# Altium PCB button pad.PcbDoc
Units mm, origin at the board's own origin, x right, y up, seen from the top; angles counter-clockwise.
Board outline 193 x 66 mm, 2 copper layers (Top Layer, Bottom Layer); 19 components, 63 nets, 125 pads, 1 vias.
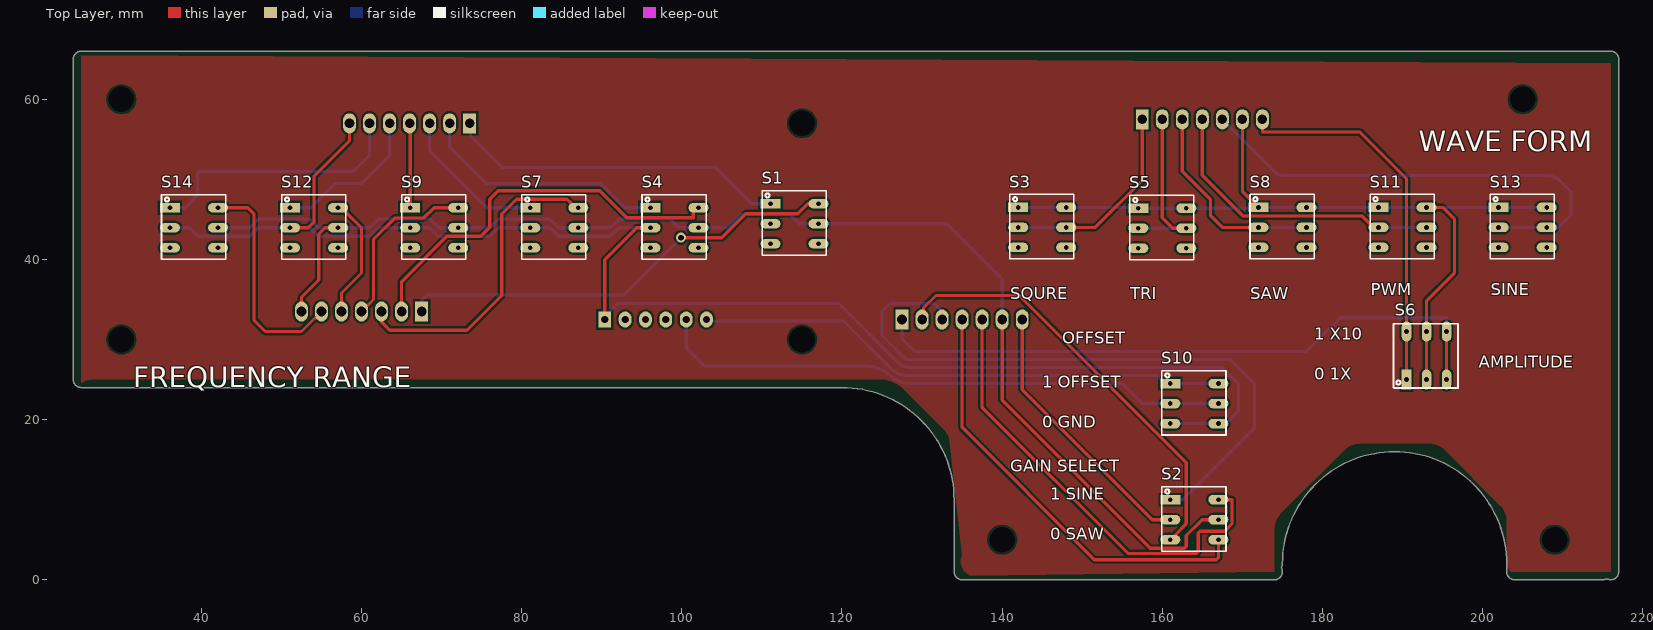
[diagram p0: Top Layer view]
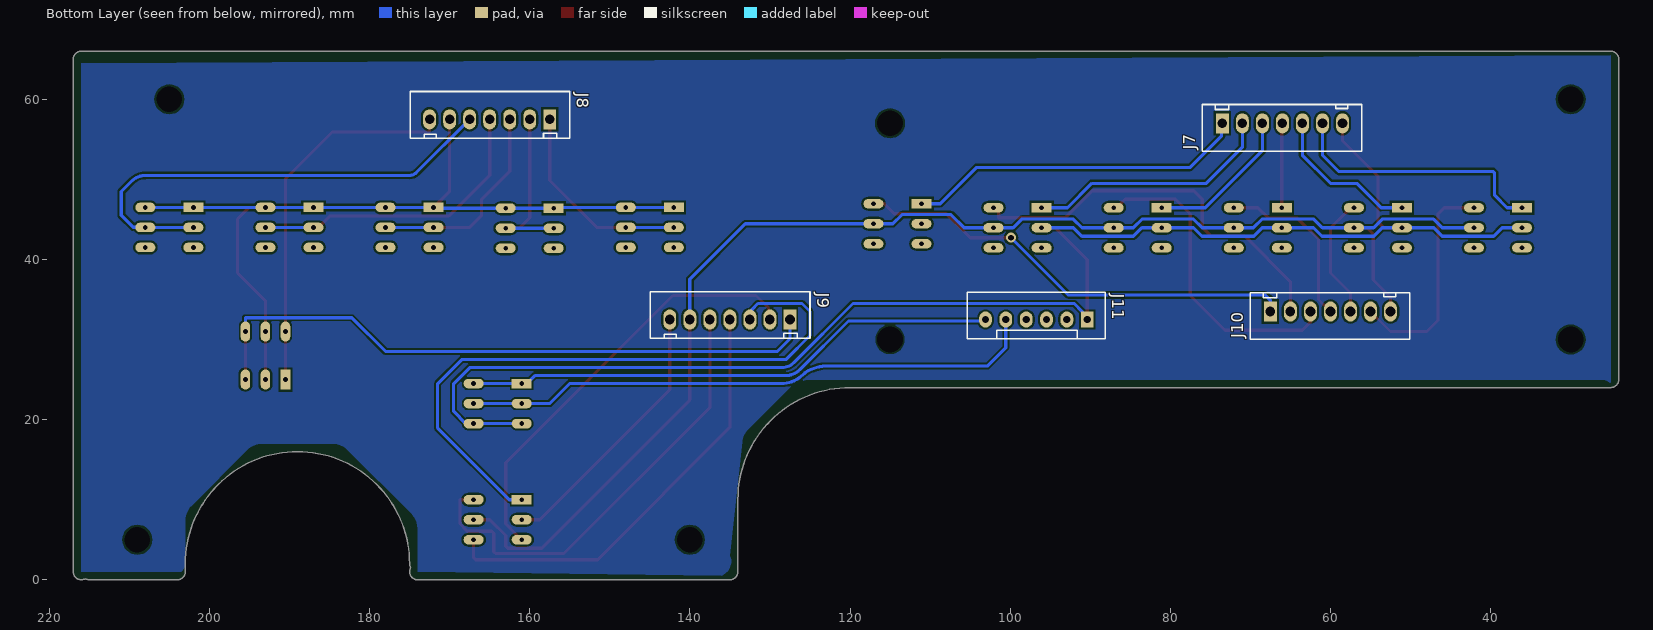
[diagram p1: Bottom Layer view, seen from below]
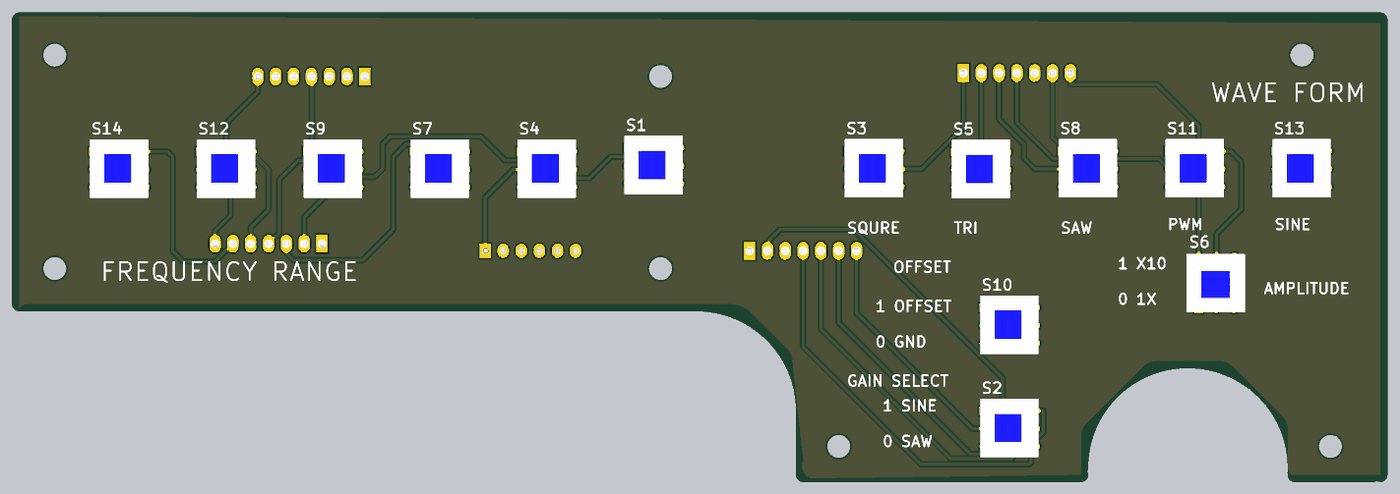
[diagram p2: 3D render of the assembled board from above, using the file's embedded part models]
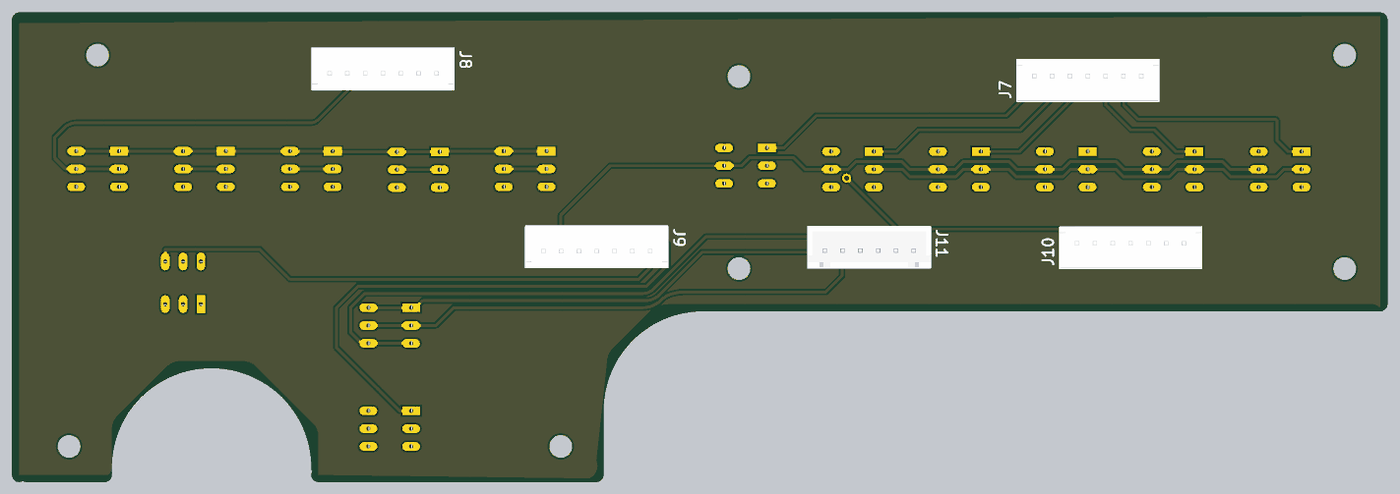
[diagram p3: 3D render of the assembled board from below, using the file's embedded part models]

## Layer stack, top to bottom
Top Solder: solder mask 0.0102, Solder Resist, Dk 3.5
Top Layer: signal copper 0.0356
Dielectric 1: dielectric 0.32, FR-4, Dk 4.8
Bottom Layer: signal copper 0.0356
Bottom Solder: solder mask 0.0102, Solder Resist, Dk 3.5

## Board outline
134,1 134,10 ccw(c120,10) 120,24 25,24 cw(c25,25) 24,25 24,65 cw(c25,65) 25,66 216,66 cw(c216,65) 217,65 217,1 cw(c216,1) 215.5,0.134 cw(c215,1) 215,0 204,0 cw(c204,1) 203.006,1.111 cw(c203.985,1.319) 202.985,1.364 ccw(c189,2) 203,2 ccw(c189,2) 175,2 cw(c174,2) 174.866,1.5 cw(c174,1) 175,1 cw(c174,1) 174,0 135,0 cw(c135,1)

## Design rules (kind name [scope] priority, off if disabled: settings)
Clearance [All] p1: gap=0.254 ignorepadtopadclearanceinfootprint=FALSE except(0: Arc-Hole Track-Hole SMDPad-Hole THPad-Hole Via-Hole Fill-Hole Poly-Hole Region-Hole Text-Hole)
PolygonConnect [All] p1: connectstyle=Relief reliefconductorwidth=0.254 reliefentries=4 polygonreliefangle="90 Angle" airgapwidth=0.254
RoutingVias [All] p1: holewidth=0.711 width=1.27 viastyle="Through Hole" minholewidth=0.711 minwidth=1.27 maxholewidth=0.711 maxwidth=1.27
SolderMaskExpansion [All] p1: expansion=0.102 istentingtop=FALSE
Width [All] p1: maxlimit=0.4 minlimit=0.4 preferedwidth=0.4
30 further rules are at their usual default settings.

## Classes and differential pairs
component class PwrSup: C17 C18 C19 C20 C21 C22 J12 J13 U6 U7 U20

## Components (designator, comment, footprint, x,y, rotation, side; value= is the part's Value field where it differs from the comment)
J7 "JST_7p" JST_7P 73.5,57 r90 bottom
J8 "JST_7p" JST_7P 157.5,57.5 r270 bottom
J9 "JST_7p" JST_7P 127.5,32.5 r270 bottom
J10 "JST_7p" JST_7P 67.5,33.5 r90 bottom
J11 "Pin Header" JST_6p 96.73,32.5 r270 bottom
S1 "SW_DPDT" "SW DPDT" 111.074,46.957 r0 top
S2 "SW_DPDT" "SW DPDT" 161,10 r0 top
S3 "SW_DPDT" "SW DPDT" 142,46.5 r0 top
S4 "SW_DPDT" "SW DPDT" 96.074,46.457 r0 top
S5 "SW_DPDT" "SW DPDT" 157,46.4 r0 top
S6 "SW_DPDT" "SW DPDT" 190.5,25 r90 top
S7 "SW_DPDT" "SW DPDT" 81.074,46.457 r0 top
S8 "SW_DPDT" "SW DPDT" 172,46.5 r0 top
S9 "SW_DPDT" "SW DPDT" 66.074,46.457 r0 top
S10 "SW_DPDT" "SW DPDT" 161,24.5 r0 top
S11 "SW_DPDT" "SW DPDT" 187,46.5 r0 top
S12 "SW_DPDT" "SW DPDT" 51.074,46.457 r0 top
S13 "SW_DPDT" "SW DPDT" 202,46.5 r0 top
S14 "SW_DPDT" "SW DPDT" 36.074,46.457 r0 top

## Footprints (in the part's own frame and the unit in brackets; to place one, negate y for a bottom-side part, rotate by r counter-clockwise, add the part's x,y. Pads: shape width x height; smd on the part's side, far side on the other; paste and mask are expansions set on the pad)
JST_6p [mm]
  rect 2x1.6 hole 0.9: 1(0,6.35)
  oval 2x1.6 hole 0.9: 2(0,3.81) 3(0,1.27) 4(0,-1.27) 5(0,-3.81) 6(0,-6.35)
  silkscreen extent -3.4,-8.6 2.4,8.6, body extent -3.43,-8.69 2.32,8.71, height 7.01
JST_7P [mm]
  rect 2.5x1.6 hole 1.2: 1(0,0)
  oval 2.5x1.6 hole 1.2: 2(0,-2.5) 3(0,-5) 4(0,-7.5) 5(0,-10) 6(0,-12.5) 7(0,-15)
  silkscreen extent -3.48,-17.42 2.35,2.5, body extent -3.35,-17.4 2.4,2.5, height 7.01
"SW DPDT" [mm]
  rect 2.5x1.2 hole 0.6: 1(0,0)
  oval 2.5x1.2 hole 0.6: 2(0,-2.5) 3(0,-5) 4(6,-5) 5(6,-2.5) 6(6,0)
  silkscreen extent -1.05,-6.42 6.95,1.62, body extent -1.07,-6.46 6.93,1.54, height 12.25

## Part data
J11: library part JST_6p

## Free pads (board coordinates)
  round 1.524 hole 3.2: 10(30,30) 11(115,30) 12(115,57) 13(30,60) 14(205,60) 15(209,5) 16(140,5)

## Via types
v1: diameter 1.27, hole 0.711, Top Layer to Bottom Layer, 1 vias

## Nets (pads, with @x,y where several pads share a name; then routed paths per layer and width w, separated by ;. In a path a pad name is that pad's centre, name@x,y a point inside that pad or via, vN(x,y) a via of type N, cw(c..) or ccw(c..) an arc to the next point about the centre after c; other vN are vias at no path point)
1IN+: 
1IN-: 
2IN+: J7.7 J11.1 S4.2 S7.2 S9.2 S10.3 S10.4 S12.2 S14.2 | length 192.6
  Top Layer w0.4: S12.2 53.34,43.957 54.077,44.694 54.077,50.419 58.5,54.842 J7.7 ; J11.1 90.38,39.976 94.361,43.957 S4.2
  Bottom Layer w0.4: S14.2 38.568,43.957 39.624,42.901 46.035,42.901 47.092,43.957 S12.2 53.543,43.957 54.6,42.901 61.062,42.901 62.118,43.957 S9.2 68.529,43.957 69.586,42.901 76.048,42.901 77.104,43.957 S7.2 83.551,43.957 84.607,42.901 91.044,42.901 92.1,43.957 S4.2 ; J11.1 90.98,33.1 90.98,33.48 92,34.5 119.627,34.5 127.01,27.117 ccw(c128.5,28.607) 128.5,26.5 167.5,26.5 169.5,24.5 169.5,21.03 167.97,19.5 S10.4 S10.3
2IN-: 
3IN+: 
3IN-: 
4IN+: J8.2 S5.2 S5.5 | length 21.8
  Top Layer w0.4: J8.2 160,45.19 161.29,43.9 S5.5
  Bottom Layer w0.4: S5.2 S5.5
4IN-: 
5IN-: J9.5 S2.6 | length 57.4
  Top Layer w0.4: J9.5 137.5,21.504 155.727,3.277 164.266,3.277 164.5,3.511 164.5,5.836 164.734,6.071 167.792,6.071 168.707,6.985 168.707,10 S2.6
6IN-: 
7IN-: J9.4 S2.4 | length 54.7
  Top Layer w0.4: J9.4 135,19.026 151.526,2.5 166.766,2.5 167,2.734 S2.4
AOUT1: 
AOUT2: J8.1 S3.2 S3.5 | length 25.6
  Top Layer w0.4: S3.5 151.638,44 157.5,49.862 J8.1
  Bottom Layer w0.4: S3.2 S3.5
AOUT4: J8.3 S8.2 S8.5 | length 26.1
  Top Layer w0.4: J8.3 162.5,51 166,47.5 166,45.5 167.5,44 S8.2
  Bottom Layer w0.4: S8.2 S8.5
AOUT5: J9.3 S2.1 | length 81.1
  Bottom Layer w0.4: J9.3 132.27,32.73 132.27,33.73 131.5,34.5 126,34.5 125,33.5 125,30.5 128,27.5 168.5,27.5 171.5,24.5 171.5,18.94 162.56,10 S2.1
AOUT6: 
AOUT7: J9.2 S2.3 | length 54.1
  Top Layer w0.4: J9.2 130.182,32.682 130.182,33.948 131.734,35.5 142.122,35.5 162.992,14.63 162.992,6.985 161.646,5.639 S2.3
INTA: J9.6 J10.7 S1.5 S2.5 S4.5 S7.5 S9.5 S12.5 S14.5 | length 170.9
  Top Layer w0.4: J10.7 52.5,35.279 54.661,37.44 54.661,43.18 55.438,43.957 S12.5 ; J9.6 140,22.433 158.496,3.937 162.766,3.937 163,4.171 163,5.527 164.973,7.5 S2.5
  Bottom Layer w0.4: S14.5 46.04,43.957 47.117,45.034 53.533,45.034 54.61,43.957 S12.5 61.011,43.957 62.088,45.034 68.555,45.034 69.632,43.957 S9.5 76.022,43.957 77.099,45.034 83.541,45.034 84.618,43.957 S7.5 91.034,43.957 92.111,45.034 98.552,45.034 99.629,43.957 S4.5 105.74,43.957 107.402,45.618 113.487,45.618 114.649,44.457 S1.5 133.059,44.457 140,37.516 J9.6
INTB: J9.7 S2.2 | length 34
  Top Layer w0.4: J9.7 142.5,23.75 158.75,7.5 S2.2
JC1: J10.1 S1.6 | length 56
  Top Layer w0.4: v1(99.898,42.723) 105.004,42.723 108.001,45.72 114.478,45.72 115.715,46.957 S1.6
  Bottom Layer w0.4: J10.1 67.5,34.925 68.135,35.56 92.735,35.56 v1(99.898,42.723)
JC2: J10.2 S4.6 | length 50.2
  Top Layer w0.4: J10.2 65,37.238 70.663,42.901 74.901,42.901 76,44 76,47.5 77.09,48.59 89.764,48.59 93.142,45.212 101.422,45.212 101.422,46.457 S4.6
JC3: J10.3 S7.6 | length 39.6
  Top Layer w0.4: J10.3 62.5,32.166 63.5,31.166 73.166,31.166 77.5,35.5 77.5,45.674 79.35,47.523 85.662,47.523 86.128,47.058 86.128,46.97 86.641,46.457 S7.6
JC4: J10.4 S9.6 | length 21.9
  Top Layer w0.4: J10.4 60,33.625 60.69,34.315 60.815,34.315 61.5,35 61.5,42.5 64.187,45.187 67.792,45.187 69.063,46.457 S9.6
JC5: J10.5 S12.6 | length 15.5
  Top Layer w0.4: S12.6 57.508,46.457 58.05,45.915 58.05,45.885 60,43.935 60,38.314 57.5,35.814 J10.5
JC6: J10.6 S14.6 | length 28.2
  Top Layer w0.4: S14.6 45.796,46.457 46.558,45.695 46.558,32.442 48,31 52.5,31 54.185,32.685 54.31,32.685 55,33.375 J10.6
JF1: J7.1 S1.1 | length 42.6
  Bottom Layer w0.4: J7.1 73.616,56.884 73.616,55.384 77.5,51.5 104.177,51.5 108.72,46.957 S1.1
JF2: J7.2 S4.1 | length 31.2
  Bottom Layer w0.4: J7.2 71,54 75.5,49.5 89.794,49.5 92.837,46.457 S4.1
JF3: J7.3 S7.1 | length 18.9
  Bottom Layer w0.4: J7.3 68.5,53.598 75.641,46.457 S7.1
JF4: J7.4 S9.1 | length 10.6
  Top Layer w0.4: J7.4 66.074,56.926 S9.1
JF5: J7.5 S12.1 | length 19.1
  Bottom Layer w0.4: S12.1 53.67,46.457 56.713,49.5 60,49.5 63.5,53 J7.5
JF6: J7.6 S14.1 | length 33.3
  Bottom Layer w0.4: S14.1 37.957,46.457 39.5,48 39.5,50.766 39.734,51 59,51 61,53 J7.6
NetC1_1: 
NetC2_1: 
NetC3_1: 
NetC4_1: 
NetC5_1: 
NetC6_1: 
NetC9_2: 
NetC10_1: 
NetC11_2: 
NetC12_2: 
NetC13_2: 
NetC14_2: 
NetC15_2: 
NetC16_2: 
NetC17_2: 
NetC20_1: 
NetJ12_1: 
NetJ12_3: 
NetR1_2: 
NetR10_1: 
NetU1_1: 
OUTC1: 
POTOF: J11.6 S10.1 S10.6 | length 67.2
  Bottom Layer w0.4: J11.6 103.08,32.309 120.191,32.309 126.256,26.244 ccw(c128.052,28.04) 128.052,25.5 129.5,25.5 159.35,25.5 160.35,24.5 S10.1 S10.6
"PWM in": J8.4 S11.2 S11.5 | length 37.7
  Top Layer w0.4: J8.4 165,50.5 170.059,45.441 184.919,45.441 186.36,44 S11.2
  Bottom Layer w0.4: S11.2 S11.5
"Signal Out": J8.6 S3.1 S3.6 S5.1 S5.6 S6.2 S6.5 S8.1 S8.6 S11.1 S11.6 S13.1 S13.6 | length 103.5
  Top Layer w0.4: J8.6 170,48.5 S8.1 ; S6.2 S6.5 193,34.863 196.5,38.363 196.5,45 195,46.5 S11.6
  Bottom Layer w0.4: S3.1 S3.6 156.9,46.5 S5.1 S5.6 171.9,46.4 S8.1 S8.6 S11.1 S11.6 S13.1 S13.6
"Sine in": J8.5 S13.2 S13.5 | length 59.7
  Bottom Layer w0.4: J8.5 174.146,50.854 ccw(c175,51.707) 175,50.5 207.934,50.5 cw(c207.934,47.96) 209.73,49.756 211,48.486 211,45.5 209.524,44.024 208.024,44.024 S13.5 S13.2
SO1X: J8.7 S6.1 S6.6 | length 47.1
  Top Layer w0.4: J8.7 172.5,55.905 184.683,55.905 190.5,50.089 S6.6 S6.1
SO10X: J9.1 S6.3 S6.4 | length 80.5
  Top Layer w0.4: S6.3 S6.4
  Bottom Layer w0.4: J9.1 127.5,30.063 129.063,28.5 178,28.5 182.215,32.715 195.5,32.715 S6.4
SOUT: 
Vcc+: 
Vcc-: 
VREF: J11.5 S10.2 S10.5 | length 72.5
  Bottom Layer w0.4: J11.5 100.54,28.96 102.789,26.711 122.646,26.711 cw(c122.646,20.797) 124.91,26.26 cw(c123.777,23.526) 125.871,25.618 ccw(c128.571,28.32) 128.571,24.5 155.031,24.5 157.531,22 S10.2 S10.5
pads on no net: J11.2 J11.3 J11.4 S1.2 S1.3 S1.4 S3.3 S3.4 S4.3 S4.4 S5.3 S5.4 S7.3 S7.4 S8.3 S8.4 S9.3 S9.4 S11.3 S11.4 S12.3 S12.4 S13.3 S13.4 S14.3 S14.4

## Polygon pours and split planes (outlines as drawn)
no net on Bottom Layer "NONET_L02_P004" (solid, pour order 4): 25,65.5 25,24.5 cw(c26.207,23.293) 26.207,25 124.793,25 cw(c124.793,20.879) 127.707,23.793 132.756,18.744 cw(c130.96,16.948) 133.485,17.22 135.012,3.028 ccw(c136.764,2.276) 136.04,0.512 174,1 174,6.448 cw(c176.54,6.448) 174.744,8.244 182.756,16.256 cw(c184.552,14.46) 184.552,17 193.448,17 cw(c193.448,14.46) 195.244,16.256 202.293,9.207 cw(c200.586,7.5) 203,7.5 203,2.207 ccw(c204.707,2.207) 203.5,1 216,1 216,64.5
no net on Top Layer "NONET_L01_P006" (solid, pour order 6): 25,65.5 25,24.5 cw(c26.207,23.293) 26.207,25 124.793,25 cw(c124.793,20.879) 127.707,23.793 132.756,18.744 cw(c130.96,16.948) 133.485,17.22 135.012,3.028 ccw(c136.764,2.276) 136.04,0.512 174,1 174,6.448 cw(c176.54,6.448) 174.744,8.244 182.756,16.256 cw(c184.552,14.46) 184.552,17 193.448,17 cw(c193.448,14.46) 195.244,16.256 202.293,9.207 cw(c200.586,7.5) 203,7.5 203,2.207 ccw(c204.707,2.207) 203.5,1 216,1 216,64.5

## Silkscreen, mask and mechanical layers (free items; w line width, h text height)
Top Overlay:
  text "WAVE FORM" at 192,53.5 h2.54
  text "PWM" at 186,35.5 h1.5
  text "SINE" at 201,35.5 h1.5
  text "SQURE" at 141,35 h1.5
  text "TRI" at 156,35 h1.5
  text "SAW" at 171,35 h1.5
  text "1 X10" at 179,30 h1.5
  text "OFFSET" at 147.5,29.5 h1.5
  text "AMPLITUDE" at 199.5,26.5 h1.5
  text "0 1X" at 179,25 h1.5
  text "FREQUENCY RANGE" at 31.5,24.027 h2.54
  text "1 OFFSET" at 145,24 h1.5
  text "0 GND" at 145,19 h1.5
  text "GAIN SELECT" at 141,13.5 h1.5
  text "1 SINE" at 146,10 h1.5
  text "0 SAW" at 146,5 h1.5
Mechanical 11:
  lines w2: 174,1 135,1 135,10 ccw(c120,10) 120,25 25,25 25,65 216,65 216,1 204,1 ; 174.033,1.002 cw(c189,2) 203.985,1.319